# Altium PCB Shared_IoT_Dev.PcbDoc
Units mm, origin at the board's own origin, x right, y up, seen from the top; angles counter-clockwise.
Board outline 66.67 x 60.32 mm, 2 copper layers (Top Layer, Bottom Layer); 59 components, 68 nets, 257 pads, 159 vias.
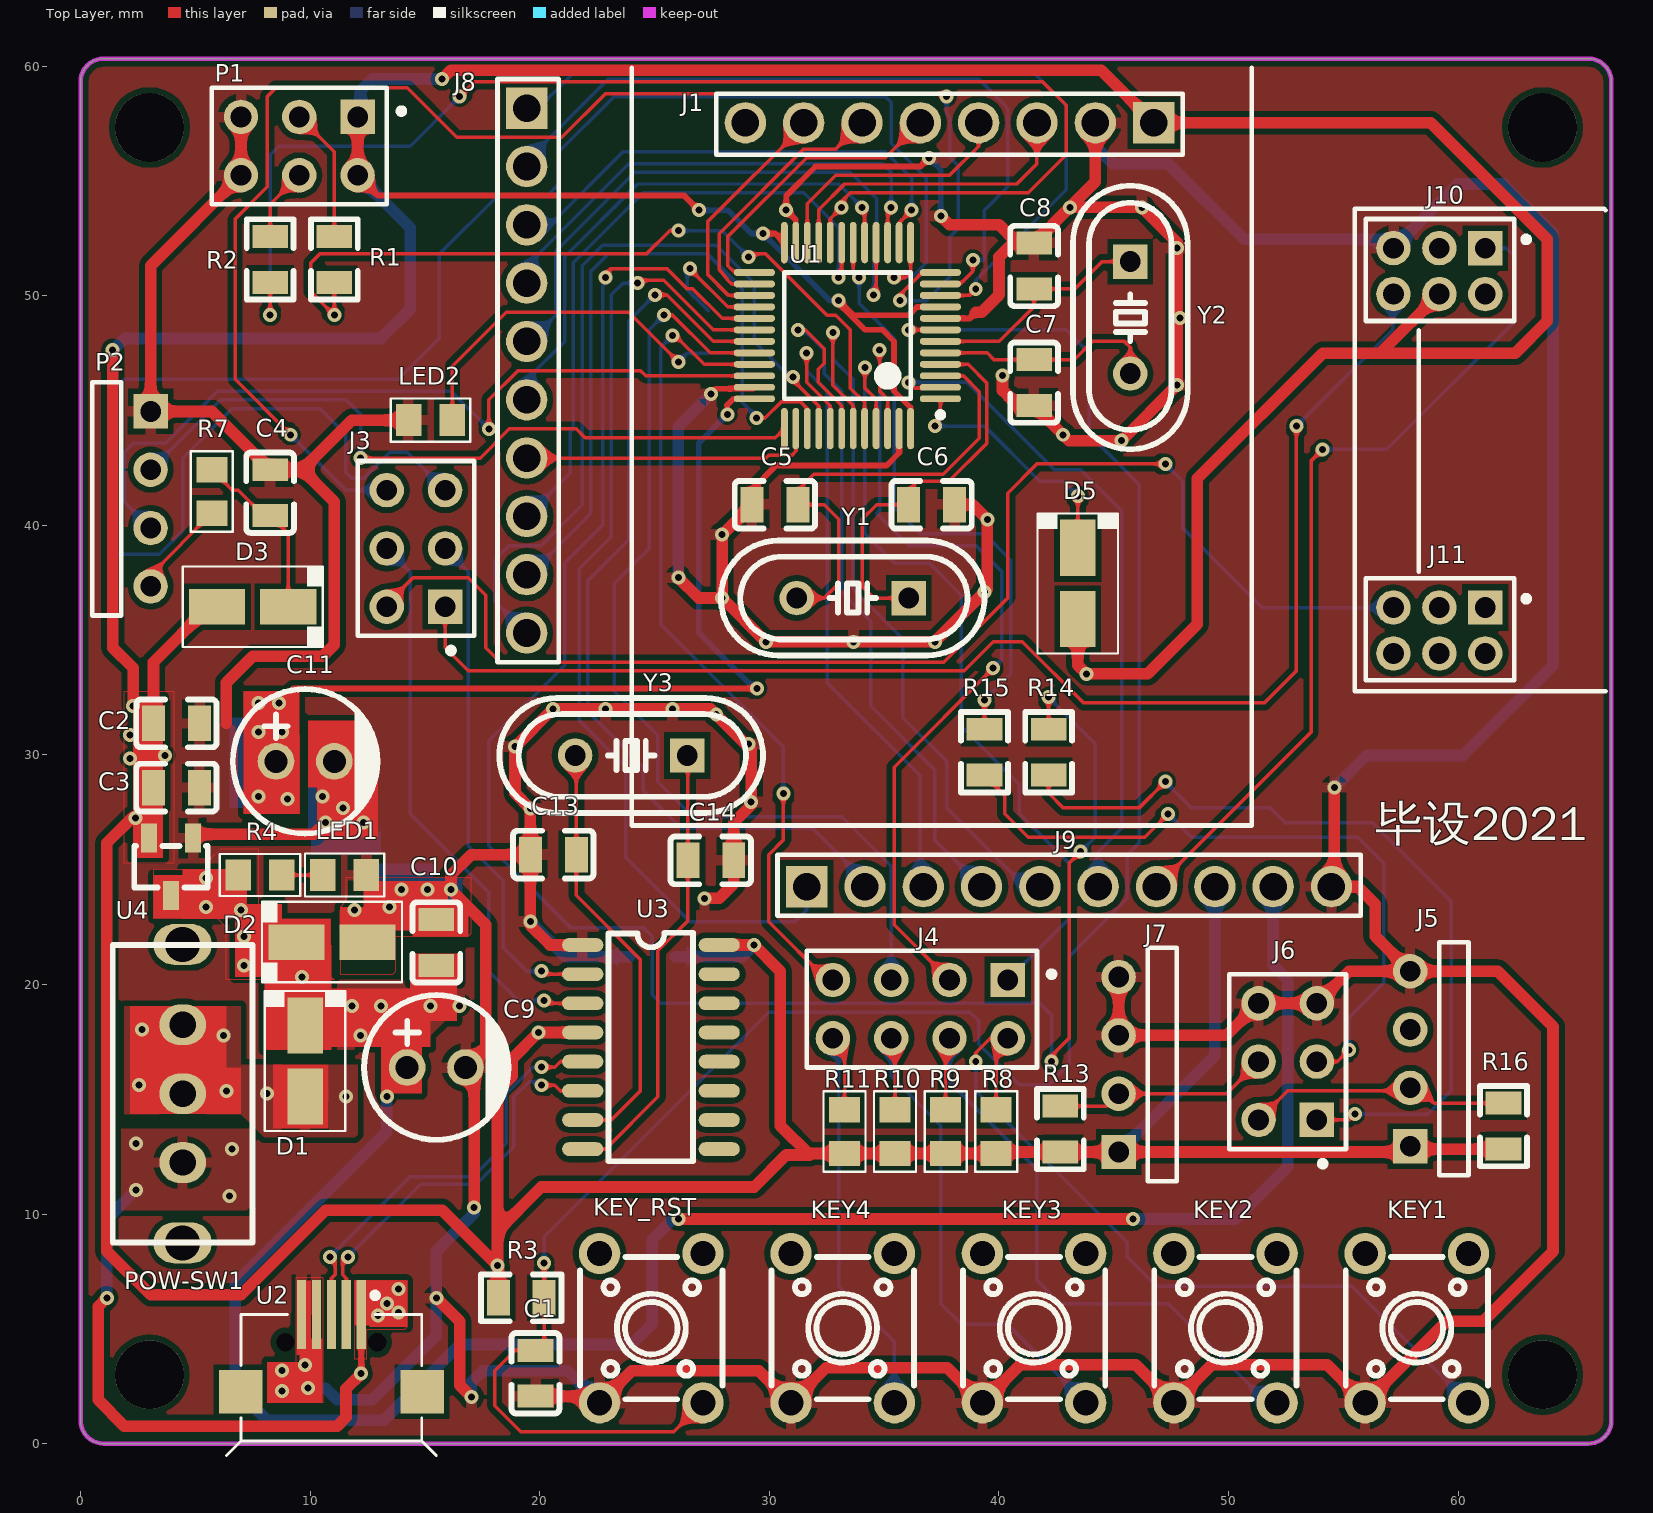
[diagram p0: Top Layer view]
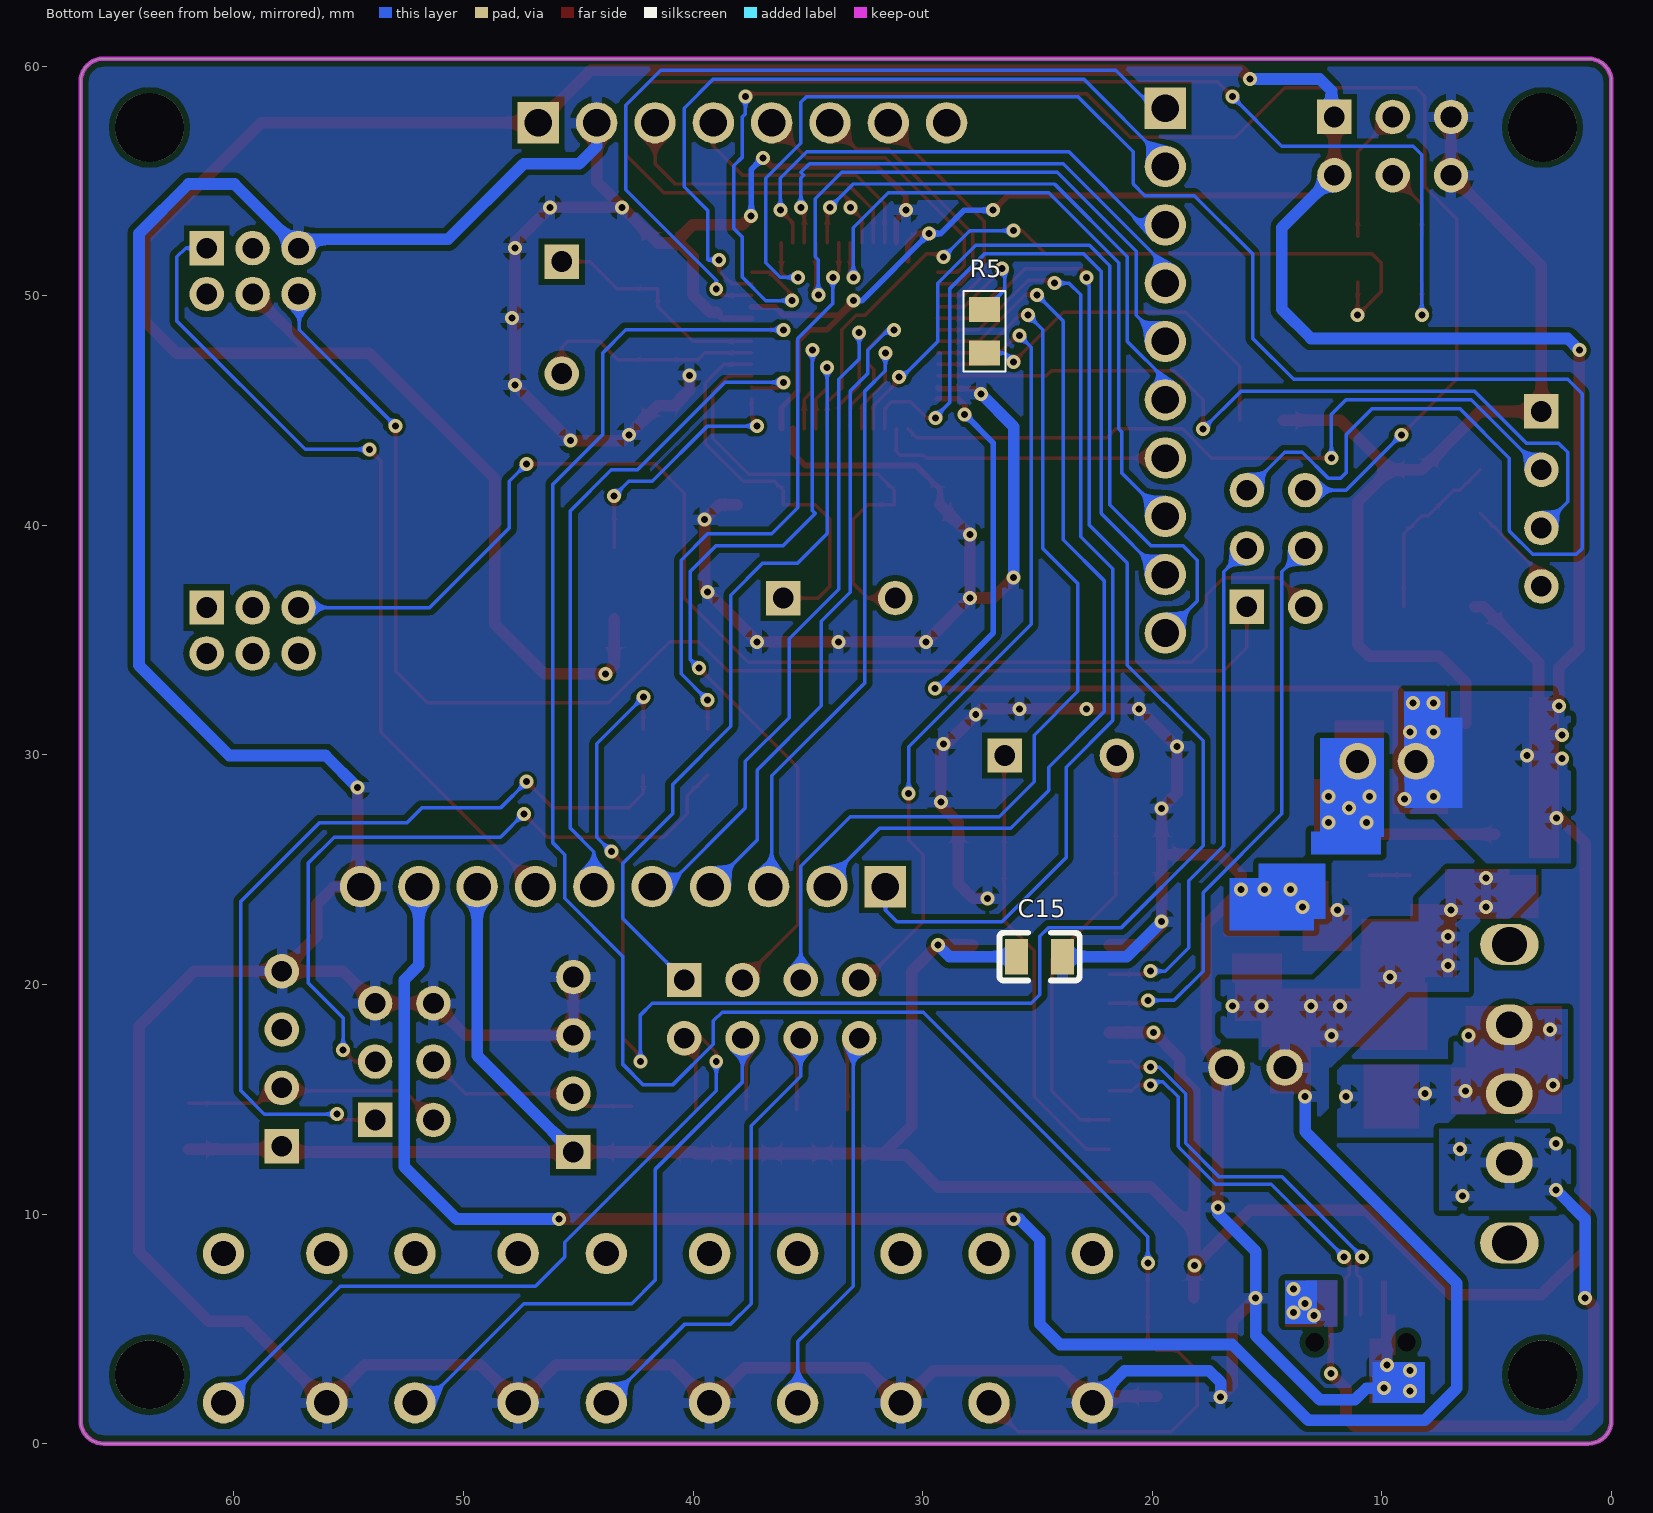
[diagram p1: Bottom Layer view, seen from below]

## Layer stack, top to bottom
Top Solder: solder mask 0.0102, Solder Resist, Dk 3.5
Top Layer: signal copper 0.0356
Dielectric 1: dielectric 0.32, FR-4, Dk 4.8
Bottom Layer: signal copper 0.0356
Bottom Solder: solder mask 0.0102, Solder Resist, Dk 3.5

## Board outline
1,0 cw(c1,1) 0,1.016 0,1 0,59.325 cw(c1,59.325) 1.016,60.325 1,60.325 65.675,60.325 cw(c65.675,59.325) 66.675,59.309 66.675,59.325 66.675,1 cw(c65.675,1) 65.659,0 65.675,0

## Design rules (kind name [scope] priority, off if disabled: settings)
Clearance via_poly [IsVia vs InPolygon] p1: gap=0.152
Clearance poly [InPolygon] p2: gap=0.254
Clearance all [All] p3: gap=0.152
DiffPairsRouting [InDifferentialPairClass('90OM')] p1: maxlimit=0.178 minlimit=0.178 mostfreqgap=0.178 toplayer_minwidth=0.152 toplayer_maxwidth=0.152 toplayer_prefwidth=0.152 bottomlayer_minwidth=0.152 bottomlayer_maxwidth=0.152 bottomlayer_prefwidth=0.152 maxuncoupledlength=12.7
HoleToHoleClearance [All] p1: gap=0 allowstackedmicrovias=TRUE
MinimumSolderMaskSliver [All] p1: minsoldermaskwidth=0
PolygonConnect [All] p1: connectstyle=Relief reliefconductorwidth=0.457 reliefentries=4 polygonreliefangle="90 Angle" airgapwidth=0.254
RoutingVias [All] p1: holewidth=0.305 width=0.61 viastyle="Through Hole" minholewidth=0.305 minwidth=0.61 maxholewidth=0.305 maxwidth=0.61
SilkToSilkClearance [All] p1: silktosilkclearance=0.051
SilkToSolderMaskClearance [IsPad] p1: minsilkscreentomaskgap=0.051 clearancetoexposedcopper=TRUE
SolderMaskExpansion [All] p1: expansion=0.064
Width gnd [InNetClass('GND')] p1: maxlimit=0.762 minlimit=0.254 preferedwidth=0.508
Width pwr [InNetClass('PWR')] p2: maxlimit=0.762 minlimit=0.254 preferedwidth=0.508
Width wall [All] p3: maxlimit=0.152 minlimit=0.152 preferedwidth=0.152
25 further rules are at their usual default settings.

## Classes and differential pairs
net class GND: GND
net class PWR: VBUS VCC3V3 VCC5V
differential pair class 90OM: USB1
differential pair USB1: +D+ -D-

## Components (designator, comment, footprint, x,y, rotation, side; value= is the part's Value field where it differs from the comment)
C1 "CAP" C0805 19.812,4.064 r270 top
C2 "CAP" C0805 3.175,31.369 r0 top
C3 "CAP" C0805 3.175,28.575 r0 top
C4 "CAP" C0805 8.255,40.418 r90 top
C5 "CAP" C0805 29.242,40.894 r0 top
C6 "CAP" C0805 38.068,40.894 r180 top
C7 "CAP" C0805 41.529,47.212 r270 top
C8 "CAP" C0805 41.529,50.292 r90 top
C9 "CAP_POL" CAP-TH_POL 14.224,16.383 r0 top
C10 "CAP" C0805 15.494,22.828 r270 top
C11 "CAP_POL" CAP-TH_POL 8.509,29.718 r0 top
C13 "22pF" C0805 21.59,25.654 r180 top
C14 "22pF" C0805 26.448,25.4 r0 top
C15 "0.1uF" C0805 25.908,21.209 r180 bottom
D1 "1N4007" SMA 9.779,16.663 r270 top
D2 "1N4007" SMA 10.948,21.844 r0 top
D3 "1N4007" SMA 7.493,36.449 r180 top
D5 "Diode 1N4148" SMA 43.434,37.465 r270 top
J1 "Header_8" HDR-TH_8P-P2.54-V 46.736,57.531 r180 top
J3 "Header 3X2" HDR2X3 15.875,36.449 r90 top
J4 "Header4x2" HDR2X4 40.386,20.193 r180 top
J5 "DHT11" HDR1X4H 57.912,12.954 r90 top
J6 "Header 3X2" HDR2X3 53.848,14.097 r90 top
J7 "DS18B20" HDR1X4H 45.212,12.7 r90 top
J8 "Header_10" HDR-TH_10P-P2.54-V 19.431,58.166 r270 top
J9 "Header_10" HDR-TH_10P-P2.54-V 31.623,24.257 r0 top
J10 "Header3X2_Small" HDR3X2_Small 61.182,52.07 r180 top
J11 "Header3X2_Small" HDR3X2_Small 61.182,36.417 r180 top
KEY1 "KEY" KEY-TH_4P 55.951,1.778 r90 top
KEY2 "KEY" KEY-TH_4P 47.615,1.778 r90 top
KEY3 "KEY" KEY-TH_4P 39.279,1.778 r90 top
KEY4 "KEY" KEY-TH_4P 30.942,1.778 r90 top
KEY_RST "KEY" KEY-TH_4P 22.606,1.778 r90 top
LED1 "LED2_1" 0805C 11.496,24.765 r0 top
LED2 "LED2_1" 0805C 15.24,44.577 r180 top
P1 "Header 3X2" HDR2X3 12.065,57.785 r180 top
P2 "SWD" HDR1X4H 3.048,44.958 r270 top
POW-SW1 "Switch" SW 4.445,15.24 r90 top
R1 "100K,0603" R0805 11.049,50.578 r90 top
R2 "100K,0603" R0805 8.255,52.578 r270 top
R3 "10K,0603" R0805 20.193,6.35 r180 top
R4 "Res2" 0805R 7.813,24.765 r0 top
R5 "Res2" 0805R 27.305,48.448 r270 bottom
R7 "Res2" 0805R 5.715,41.468 r90 top
R8 "Res2" 0805R 39.878,13.589 r270 top
R9 "Res2" 0805R 37.677,13.589 r270 top
R10 "Res2" 0805R 35.475,13.589 r270 top
R11 "Res2" 0805R 33.274,13.589 r270 top
R13 "4.7K" R0805 42.672,14.7 r270 top
R14 "100" R0805 42.164,29.115 r90 top
R15 "100" R0805 39.37,29.115 r90 top
R16 "4.7K" R0805 61.976,14.827 r270 top
U1 "STM32F103C8T6" 48P 33.401,48.26 r180 top
U2 "USB-mrico" MICRO_USB 10.922,3.937 r0 top
U3 "CH340G" CH340G_SOIC 21.869,21.717 r180 top
U4 "XC6206P332MR" XC_SOT-23-3 4.887,26.375 r90 top
Y1 "32.768K" CRYSTAL 36.068,36.83 r180 top
Y2 "8M" CRYSTAL 45.72,51.486 r270 top
Y3 "CRYSTAL_12M" CRYSTAL 26.416,29.972 r180 top

## Footprints (in the part's own frame and the unit in brackets; to place one, negate y for a bottom-side part, rotate by r counter-clockwise, add the part's x,y. Pads: shape width x height; smd on the part's side, far side on the other; paste and mask are expansions set on the pad)
48P [mm]
  oval 1.8x0.3 smd: 1(-4.05,2.75) 2(-4.05,2.25) 3(-4.05,1.75) 4(-4.05,1.25) 5(-4.05,0.75) 6(-4.05,0.25) 7(-4.05,-0.25) 8(-4.05,-0.75) 9(-4.05,-1.25) 10(-4.05,-1.75) 11(-4.05,-2.25) 12(-4.05,-2.75) 25(4.05,-2.75) 26(4.05,-2.25) 27(4.05,-1.75) 28(4.05,-1.25) 29(4.05,-0.75) 30(4.05,-0.25) 31(4.05,0.25) 32(4.05,0.75) 33(4.05,1.25) 34(4.05,1.75) 35(4.05,2.25) 36(4.05,2.75)
  oval 0.3x1.8 smd: 13(-2.75,-4.05) 14(-2.25,-4.05) 15(-1.75,-4.05) 16(-1.25,-4.05) 17(-0.75,-4.05) 18(-0.25,-4.05) 19(0.25,-4.05) 20(0.75,-4.05) 21(1.25,-4.05) 22(1.75,-4.05) 23(2.25,-4.05) 24(2.75,-4.05) 37(2.75,4.05) 38(2.25,4.05) 39(1.75,4.05) 40(1.25,4.05) 41(0.75,4.05) 42(0.25,4.05) 43(-0.25,4.05) 44(-0.75,4.05) 45(-1.25,4.05) 46(-1.75,4.05) 47(-2.25,4.05) 48(-2.75,4.05)
  silkscreen extent -4.18,-2.75 2.75,3.57, body extent -3.5,-3.5 3.5,3.5, height 1.6
0805C [mm] "Chip Capacitor, 2-Leads, Body 2.0x1.3mm, IPC Medium Density"
  rect 1.1x1.4 smd: 1(-0.95,0) 2(0.95,0)
  silkscreen extent -1.73,-0.94 1.73,0.94, body extent -1.05,-0.67 1.05,0.67, height 1.2
0805R [mm] "Chip Resistor, 2-Leads, Body 2.0x1.3mm, IPC Medium Density"
  rect 1.1x1.35 smd: 1(-0.95,0) 2(0.95,0)
  silkscreen extent -1.75,-0.91 1.75,0.91, body extent -1.05,-0.67 1.05,0.67, height 1.2
C0805 [mm]
  rect 1x1.55 smd: 1(0,0) 2(2,0)
  silkscreen extent -0.75,-1.04 2.75,1.04
CAP-TH_POL [mm]
  round 1.6 hole 1: 1(0,0) 2(2.54,0)
  silkscreen extent -1.88,-3.15 4.44,3.15
CH340G_SOIC [mm]
  oval 1.798x0.6 smd: 1(0,0) 2(0,1.27) 3(0,2.54) 4(0,3.81) 5(0,5.08) 6(0,6.35) 7(0,7.62) 8(0,8.89) 9(-5.944,8.89) 10(-5.944,7.62) 11(-5.944,6.35) 12(-5.944,5.08) 13(-5.944,3.81) 14(-5.944,2.54) 15(-5.944,1.27) 16(-5.944,0)
  silkscreen extent -4.8,-0.53 -1.12,9.42
CRYSTAL [mm]
  rect 1.5x1.5 hole 0.9: 1(0,0)
  round 1.5 hole 0.9: 2(4.877,0)
  silkscreen extent -3.3,-2.5 8.18,2.5
HDR1X4H [mm] "Connector; Header; 4 Position; Right Angle"
  rect 1.5x1.5 hole 0.9: 1(0,0)
  round 1.5 hole 0.9: 2(2.54,0) 3(5.08,0) 4(7.62,0)
  silkscreen extent -1.27,-2.54 8.89,-1.27
HDR2X3 [mm] "Connector; Header; 3x2 Position"
  rect 1.5x1.5 hole 0.9: 1(0,0)
  round 1.5 hole 0.9: 2(0,2.54) 3(2.54,0) 4(2.54,2.54) 5(5.08,0) 6(5.08,2.54)
  silkscreen extent -2.03,-1.27 6.35,3.81
HDR2X4 [mm]
  rect 1.5x1.5 hole 0.9: 1(0,0)
  round 1.5 hole 0.9: 2(0,2.54) 3(2.54,0) 4(2.54,2.54) 5(5.08,0) 6(5.08,2.54) 7(7.62,0) 8(7.62,2.54)
  silkscreen extent -2.03,-1.27 8.76,3.81
HDR3X2_Small [mm]
  rect 1.5x1.5 hole 0.9: 1(0,0)
  round 1.5 hole 0.9: 2(0,2) 3(2,0) 4(2,2) 5(4,0) 6(4,2)
  silkscreen extent -1.91,-1.27 5.21,3.18
HDR-TH_8P-P2.54-V [mm]
  rect 1.8x1.8 hole 1.2: 1(0,0)
  round 1.8 hole 1.2: 2(2.54,0) 3(5.08,0) 4(7.62,0) 5(10.16,0) 6(12.7,0) 7(15.24,0) 8(17.78,0)
  silkscreen extent -1.27,-1.27 19.05,1.4
HDR-TH_10P-P2.54-V [mm]
  rect 1.8x1.8 hole 1.2: 1(0,0)
  round 1.8 hole 1.2: 2(2.54,0) 3(5.08,0) 4(7.62,0) 5(10.16,0) 6(12.7,0) 7(15.24,0) 8(17.78,0) 9(20.32,0) 10(22.86,0)
  silkscreen extent -1.27,-1.27 24.13,1.4
KEY-TH_4P [mm]
  round 1.8 hole 1.1: 1(0,0) 2(6.502,0) 3(0,-4.501) 4(6.502,-4.501)
  silkscreen extent 0.15,-5.35 6.35,0.85
MICRO_USB [mm]
  rect 0.4x3 smd: 1(1.3,1.679) 2(0.65,1.679) 3(0,1.679) 4(-0.65,1.679) 5(-1.3,1.679)
  round 0 hole 0.8 unplated: MH1(2,0.471) MH2(-2,0.471)
  rect 1.9x1.9 smd: ""(-3.95,-1.679) ""(3.95,-1.679)
  silkscreen extent -4.57,-4.46 4.57,2.64
R0805 [mm]
  rect 1x1.55 smd: 1(0,0) 2(2,0)
  silkscreen extent -0.75,-1.02 2.75,1.02
SMA [mm] "Molded Diode, 2-Leads, Body 4.3x2.7mm, IPC Medium Density"
  rect 2.45x1.55 smd: 1(1.55,0) 2(-1.55,0)
  silkscreen extent -3.05,-1.75 3.05,1.75, body extent -2.3,-1.45 2.3,1.45, height 2.44
SW [mil]
  oval 70x80 hole 45: 1(-118.11,0) 2(0,0) 3(118.11,0)
  oval 70x100 hole 60: 4(-255.91,0) 5(255.91,0)
  silkscreen extent -255,-120 255,120
XC_SOT-23-3 [mm]
  rect 1.25x0.7 smd: 1(0,0) 2(0,1.9) 3(-2.499,0.95)
  silkscreen extent -2.15,-0.65 -0.35,2.55

## Part data
C13 C14 C15: library part CAP, "CAP"
D1 D2 D3: library part DIODE
D5: "High Conductance Fast Diode"
J3 J6 P1: "Header, 3-Pin, Dual row"
J5 J7 P2: library part "Header 4", "Header, 4-Pin"
LED1 LED2: "Typical RED, GREEN, YELLOW, AMBER GaAs LED"
POW-SW1: library part Swich_On_Off
R1 R2 R3: library part Res2, "Resistor"
R4 R5 R8 R9 R10 R11: library part Res_3, "Resistor"
R7: "Resistor"
R13 R14 R15 R16: library part RES, "RES"
U2: library part usb-STM
U4: "XC6206P332MR Power Lower to 3.3v"
Y1 Y2 Y3: library part CRYSTAL, "CRYSTAL"

## Free pads (board coordinates)
  round 3 hole 3 unplated paste+0.305: 0(3,3) 0(3,57.325) 0(63.675,3) 0(63.675,57.325)

## Via types
v1: diameter 0.61, hole 0.305, Top Layer to Bottom Layer, 159 vias

## Nets (pads, with @x,y where several pads share a name; then routed paths per layer and width w, separated by ;. In a path a pad name is that pad's centre, name@x,y a point inside that pad or via, vN(x,y) a via of type N, cw(c..) or ccw(c..) an arc to the next point about the centre after c; other vN are vias at no path point)
BOOT0: R1.1 U1.44 | length 34.7
  Top Layer w0.152: R1.1 v1(11.049,49.149) 10.033,50.165 10.033,51.435 10.414,51.816 24.638,51.816 25.654,52.832 v1(26.035,52.832) ; v1(29.083,51.689) 29.21,51.689 29.337,51.816 29.845,51.816 32.512,49.149 32.893,49.149 33.528,48.514 33.528,45.974 34.151,45.351 U1.44
  Bottom Layer w0.152: v1(26.035,52.832) 27.94,52.832 v1(29.083,51.689)
BOOT1: R2.2 U1.20 | length 59.6
  Top Layer w0.152: v1(8.255,49.149) R2.2 ; v1(16.51,58.674) 17.145,59.309 41.91,59.309 42.926,58.293 42.926,56.134 41.275,54.483 33.528,54.483 33.147,54.102 v1(33.147,53.848) 32.651,53.352 U1.20
  Bottom Layer w0.152: v1(8.255,49.149) 8.255,56.134 8.636,56.515 14.351,56.515 v1(16.51,58.674)
D+: U2.3 U3.5 | length 18.5
  Top Layer w0.152: v1(10.853,8.128) 10.955,8.128 11.082,8.001 11.082,7.352 10.922,7.192 U2.3 ; v1(20.066,16.396) 20.653,16.396 20.894,16.637 U3.5
  Bottom Layer w0.152: v1(10.853,8.128) 14.359,11.633 17.094,11.633 18.542,13.081 18.542,15.24 19.698,16.396 v1(20.066,16.396)
D-: U2.2 U3.6 | length 17.6
  Top Layer w0.152: U2.2 11.572,7.192 11.412,7.352 11.412,8.001 11.539,8.128 v1(11.641,8.128) ; v1(20.066,15.608) 20.653,15.608 20.894,15.367 U3.6
  Bottom Layer w0.152: v1(11.641,8.128) 14.816,11.303 17.231,11.303 18.775,12.848 18.872,12.944 18.872,15.103 19.537,15.769 19.906,15.769 v1(20.066,15.608)
DHT11_DQ: J5.2 J6.2 R16.1 | length 11.5
  Top Layer w0.152: J6.2 52.578,15.367 57.785,15.367 J5.2 58.293,15.494 58.96,14.827 R16.1
DS_DQ: J6.4 J7.2 R13.1 | length 9.4
  Top Layer w0.152: R13.1 44.672,14.7 J7.2 49.911,15.24 J6.4
ESP_RST: J9.7 J10.1 | length 37
  Top Layer w0.152: J9.7 53.594,30.988 53.594,42.799 v1(54.102,43.307)
  Bottom Layer w0.152: v1(54.102,43.307) 56.896,43.307 62.484,48.895 62.484,51.689 62.103,52.07 J10.1@61.214,52.07
ESP_RX: J3.1 J10.6 | length 59.7
  Top Layer w0.152: J3.1 15.875,34.671 16.891,33.655 38.481,33.655 39.751,34.925 41.021,34.925 43.688,32.258 51.562,32.258 52.959,33.655 v1(52.959,44.323)
  Bottom Layer w0.152: v1(52.959,44.323) 57.15,48.514 J10.6@57.15,50.165
ESP_TX: J3.2 J11.5 | length 57.3
  Top Layer w0.152: J3.2 13.335,36.576 14.478,37.719 16.891,37.719 17.653,36.957 17.653,34.671 18.288,34.036 37.592,34.036 40.386,36.83 40.386,41.402 41.656,42.672 v1(47.244,42.672)
  Bottom Layer w0.152: v1(47.244,42.672) 48.006,41.91 48.006,39.878 51.467,36.417 J11.5
GND: C1.2 C2.2 C3.2 C4.2 C5.1 C6.1 C7.2 C8.2 C9.2 C10.1 C11.2 C13.2 C14.2 C15.2 D2.1 J1.2 J5.4 J6.5 J6.6 J7.3 J7.4 J9.10 J10.5 KEY1.1 KEY2.1 KEY3.1 KEY4.1 KEY_RST.1 LED1.2 LED2.2 P1.5 P1.6 P2.1 U1.8 U1.23 U1.35 U1.47 U2.4 U2.5 U3.1 U4.1 | length 374.6
  Top Layer w0.254: v1@27.368,45.657 27.661,45.949 29.286,45.949 U1.35@29.337,45.999 ; C5.1 29.242,41.561 30.277,42.596 35.103,42.596 35.651,43.144 U1.47 ; U1.23 31.151,53.304 v1(30.734,53.721) 30.734,54.356 32.004,55.626 36.576,55.626 v1(36.957,56.007) ; U1.8 38.723,49.01 38.989,49.276
  Top Layer w0.508: U4.1@5.08,26.543 10.16,26.543 v1(10.668,27.051) ; 6.35,31.369 6.35,33.147 7.493,34.29 10.541,34.29 11.049,34.798 11.049,41.021 9.652,42.418 ; P1.5 P1.6 3.048,51.308 P2.1 5.715,44.958 C4.2 9.652,42.418 ; LED2.2 11.811,44.577 9.652,42.418 ; v1(15.494,6.35) 16.51,5.334 16.51,2.54 v1(17.018,2.032) ; v1(17.145,10.287) 17.145,16.002 C9.2 17.653,17.272 17.653,22.606 v1(16.129,24.13) 16.129,24.765 17.018,25.654 C13.2 ; C1.2 22.32,2.064 KEY_RST.1 24.003,3.175 29.545,3.175 KEY4.1 32.466,3.302 37.755,3.302 KEY3.1 40.93,3.429 45.964,3.429 KEY2.1 49.266,3.429 54.3,3.429 KEY1.1 59.507,5.334 61.087,5.334 64.135,8.382 64.135,18.161 61.722,20.574 J5.4@58.039,20.574 ; U3.1 20.447,21.717 19.59,22.574 v1(19.59,22.733) C13.2 ; v1(26.035,37.719) 26.924,36.83 v1(27.94,36.83) ; v1(27.178,23.749) 27.813,23.749 28.448,24.384 C14.2 28.448,27.051 29.21,27.813 29.21,30.226 27.432,32.004 v1(20.574,32.004) v1(18.923,30.353) 18.923,28.321 v1(19.59,27.654) C13.2 ; C5.1 v1(27.94,39.592) v1(27.94,36.83) ; v1(37.465,53.467) 37.846,53.086 40.005,53.086 C8.2@40.799,52.292 ; C6.1 38.862,40.894 v1(39.497,40.259) 39.497,37.211 v1(37.211,34.925) v1(29.845,34.925) v1(27.94,36.83) ; 38.989,49.276 39.243,49.276 40.005,50.038 40.005,51.689 40.608,52.292 C8.2@40.799,52.292 ; 40.157,46.076 v1(40.157,46.533) 40.157,45.872 40.818,45.212 C7.2 43.053,43.688 v1(45.339,43.688) v1(47.752,46.101) 47.752,52.324 v1(46.228,53.848) v1(43.085,53.848) ; J1.2 44.196,54.959 v1(43.085,53.848) ; J7.4 J7.3 49.911,17.78 J6.6 J6.5 55.245,20.574 J5.4 56.388,22.098 56.388,23.495 55.626,24.257 J9.10 54.61,24.384 v1(54.61,28.575) ; C8.2@40.799,52.292 C8.2 v1(43.085,53.848)
  Bottom Layer w0.254: v1(36.957,56.007) 37.465,55.499 v1(37.465,53.467)
  Bottom Layer w0.508: v1(9.906,2.413) 10.668,2.413 11.176,1.905 12.7,1.905 15.494,4.699 v1(15.494,6.35) 15.494,8.382 17.145,10.033 v1(17.145,10.287) ; v1(17.018,2.032) 17.018,2.667 17.526,3.175 21.209,3.175 KEY_RST.1 ; v1(19.59,22.733) 21.114,21.209 C15.2 ; v1(26.035,37.719) 26.035,44.298 v1(27.457,45.72) ; J1.2 44.196,56.515 44.958,55.753 47.371,55.753 50.673,52.451 56.896,52.451 J10.5@57.229,52.118 ; v1(54.61,28.575) 56.007,29.972 60.198,29.972 64.135,33.909 64.135,52.705 61.976,54.864 59.976,54.864 J10.5@57.229,52.118 ; J10.5 J10.5@57.229,52.118
  other v1: 8.763,2.286 8.763,3.175 9.779,3.429 11.938,23.241 13.462,23.368 13.97,24.13 15.113,24.13 12.319,27.051 11.43,27.686 29.21,27.94 10.541,28.194 12.319,28.194 29.083,30.48 27.686,31.75 22.86,32.004 25.781,32.004 33.655,34.925 39.37,37.084 42.799,43.942 47.879,49.022 47.752,52.07
KEY1: J4.2 KEY1.3 R8.1 | length 34.3
  Top Layer w0.152: v1@38.862,16.764 v1(38.989,16.637) 38.989,17.018 39.624,17.653 J4.2 39.878,17.145 R8.1
  Bottom Layer w0.152: v1(38.989,16.637) 38.989,15.367 45.593,8.763 45.593,8.128 46.863,6.858 55.372,6.858 KEY1.3
KEY2: J4.4 KEY2.3 R9.1 | length 28.8
  Top Layer w0.152: J4.4@37.465,17.653 J4.4 37.677,17.484 R9.1 ; KEY2.3 KEY2.3@52.578,1.778
  Bottom Layer w0.152: J4.4 37.846,15.748 41.656,11.938 41.656,7.112 42.672,6.096 47.371,6.096 51.689,1.778 KEY2.3
KEY3: J4.6 KEY3.3 R10.1 | length 24.5
  Top Layer w0.152: J4.6@35.052,17.653 J4.6 35.475,17.484 R10.1 ; KEY3.3 KEY3.3@44.323,1.778
  Bottom Layer w0.152: J4.6 35.306,16.002 37.465,13.843 37.465,6.096 38.354,5.207 40.35,5.207 KEY3.3
KEY4: J4.8 KEY4.3 R11.1 | length 21.1
  Top Layer w0.152: J4.8 33.274,17.145 R11.1 ; KEY4.3 KEY4.3@36.195,1.778
  Bottom Layer w0.152: J4.8 33.02,17.399 33.02,6.858 35.433,4.445 KEY4.3@35.433,1.778
LED2: R5.1 U1.28 | length 6
  Top Layer w0.152: v1(26.543,51.181) 26.543,51.156 28.189,49.51 U1.28
  Bottom Layer w0.152: v1(26.543,51.181) 26.518,51.181 26.416,51.283 26.416,50.267 R5.1@27.33,49.352
NetC4_1: C4.1 D3.2 R7.2 | length 7.7
  Top Layer w0.152: R7.2 6.604,41.529 6.858,41.529 7.969,40.418 C4.1 9.043,39.63 D3.2
NetC13_1: C13.1 U3.7 Y3.2 | length 18.8
  Top Layer w0.152: Y3.2 21.59,29.921 C13.1 21.59,23.876 24.384,21.082 24.384,15.367 23.114,14.097 U3.7
NetC14_1: C14.1 U3.8 Y3.1 | length 19.6
  Top Layer w0.152: U3.8 22.86,12.827 25.146,15.113 25.146,21.463 26.448,22.765 C14.1 26.448,29.94 Y3.1
NetD1_1: D1.1 POW-SW1.2 POW-SW1.3
  other v1: 11.557,15.113 8.128,15.24 6.35,15.367 2.54,15.621 6.223,17.78 2.667,18.034
NetD5_2: D5.2 U1.1 | length 11
  Top Layer w0.152: v1(37.211,44.323) 37.211,44.478 37.451,44.718 U1.1 ; D5.2 v1(43.434,41.275)
  Bottom Layer w0.152: v1(37.211,44.323) 39.37,44.323 41.783,41.91 42.799,41.91 v1(43.434,41.275)
NetJ6_1: J6.1 R14.1 | length 35.8
  Top Layer w0.152: R14.1 42.164,28.321 42.799,27.686 46.101,27.686 v1(47.244,28.829) ; J6.1 55.245,14.097 v1(55.499,14.351)
  Bottom Layer w0.152: v1(47.244,28.829) 48.387,27.686 51.816,27.686 52.451,27.051 56.261,27.051 59.69,23.622 59.69,15.367 58.674,14.351 v1(55.499,14.351)
NetJ6_3: J6.3 R15.1 | length 30.7
  Top Layer w0.152: R15.1 40.259,28.226 40.259,27.432 41.275,26.416 46.355,26.416 v1(47.371,27.432) ; J6.3 54.737,16.637 v1(55.245,17.145)
  Bottom Layer w0.152: v1(47.371,27.432) 48.387,26.416 55.626,26.416 56.769,25.273 56.769,20.066 55.245,18.542 v1(55.245,17.145)
NetLED1_1: LED1.1 R4.2 | length 1.8
  Top Layer w0.152: R4.2 LED1.1
NetLED2_1: LED2.1 R5.2 | length 15.5
  Top Layer w0.152: LED2.1 16.19,46.924 18.542,49.276 23.876,49.276 v1(26.035,47.117)
  Bottom Layer w0.152: v1(26.035,47.117) 26.416,47.498 R5.2
NetP1_3: P1.3 R1.2 | length 5.8
  Top Layer w0.152: P1.3 11.049,56.261 R1.2
NetP1_4: P1.4 R2.1 | length 3.2
  Top Layer w0.152: R2.1 8.255,53.975 P1.4
NetP2_4: P2.4 R7.1 | length 4.3
  Top Layer w0.152: P2.4 3.048,37.851 R7.1
OLED_CS: J1.3 U1.21 | length 13.5
  Top Layer w0.152: U1.21 32.151,53.741 33.274,54.864 40.767,54.864 41.656,55.753 J1.3
OLED_D0: J1.6 U1.26 | length 11.6
  Top Layer w0.152: U1.26 28.357,50.51 28.194,50.673 27.813,51.149 27.813,52.705 31.496,56.388 32.893,56.388 J1.6
OLED_D1: J1.7 U1.27 | length 10.8
  Top Layer w0.152: U1.27 28.222,50.01 27.305,50.927 27.305,53.213 31.496,57.404 J1.7
OLED_DC: J1.5 U1.25 | length 13
  Top Layer w0.152: U1.25 28.492,51.01 28.194,51.308 28.194,52.578 31.623,56.007 35.052,56.007 J1.5
OLED_RES: J1.4 U1.22 | length 11.2
  Top Layer w0.152: U1.22 31.651,54.003 32.893,55.245 37.846,55.245 39.116,56.515 J1.4
OSCIN: C7.1 U1.5 Y2.2 | length 10
  Top Layer w0.152: U1.5 39.485,47.51 39.783,47.212 C7.1 43.275,47.212 44.069,48.006 45.466,48.006 45.72,47.752 Y2.2
OSCOUT: C8.1 U1.6 Y2.1 | length 10.2
  Top Layer w0.152: U1.6 40.009,48.01 41.529,49.53 C8.1 43.307,50.292 44.501,51.486 Y2.1
PA0: J8.1 U1.10 | length 36.1
  Top Layer w0.152: U1.10 38.707,50.01 v1(38.989,50.292)
  Bottom Layer w0.152: J8.1@19.558,57.785 21.59,59.817 41.402,59.817 42.926,58.293 42.926,54.61 38.989,50.673 v1(38.989,50.292)
PA1: J8.2 U1.11 | length 32.9
  Top Layer w0.152: U1.11 38.318,50.51 38.862,51.054 v1(38.862,51.562)
  Bottom Layer w0.152: J8.2 19.431,55.88 22.987,59.436 39.116,59.436 40.386,58.166 40.386,54.737 39.37,53.721 39.37,51.562 v1(38.862,51.562)
PA4: J8.3 U1.14 | length 21.9
  Top Layer w0.152: U1.14 35.651,53.177 36.068,53.594 36.068,53.848 v1(36.195,53.721)
  Bottom Layer w0.152: J8.3@19.431,52.959 20.32,52.959 23.622,56.261 35.052,56.261 36.195,55.118 v1(36.195,53.721)
PA5: J8.4 U1.15 | length 22.3
  Top Layer w0.152: U1.15 35.151,53.82 35.179,53.792 35.235,53.848 v1(35.306,53.848) v1@35.433,53.975
  Bottom Layer w0.152: J8.4@19.431,50.419 19.431,51.308 23.876,55.753 34.925,55.753 35.306,55.372 35.179,55.245 35.306,55.118 v1(35.306,53.848)
PA6: J8.5 U1.16 | length 27
  Top Layer w0.152: v1(34.544,50.038) 34.651,50.145 U1.16
  Bottom Layer w0.152: J8.5 19.558,48.006 20.701,49.149 20.701,51.943 24.13,55.372 33.528,55.372 34.671,54.229 34.671,51.689 34.544,51.562 v1(34.544,50.038)
PA7: J8.6 U1.17 | length 23.2
  Top Layer w0.152: v1(34.036,53.848) 34.151,53.733 U1.17
  Bottom Layer w0.152: J8.6 19.431,46.355 21.082,48.006 21.082,51.689 24.257,54.864 33.02,54.864 v1(34.036,53.848)
PA8: R14.2 U1.29 | length 84.5
  Top Layer w0.152: v1(22.86,50.8) 22.86,50.927 23.114,51.181 25.527,51.181 26.416,50.292 26.67,50.292 27.952,49.01 U1.29 U1.29@29.363,49.022 ; R14.2 v1(42.164,32.512) ; v1(42.291,16.637) 42.291,16.891 43.053,17.653 43.053,25.273 v1(43.561,25.781)
  Bottom Layer w0.152: v1(22.86,50.8) 22.86,50.546 22.733,50.419 22.733,40.005 21.082,38.354 21.082,33.909 17.78,30.607 17.78,26.035 21.336,22.479 24.511,22.479 24.892,22.098 24.892,19.558 25.273,19.177 41.783,19.177 42.291,18.669 v1(42.291,16.637) ; v1(42.164,32.512) 44.196,30.48 44.196,26.416 v1(43.561,25.781)
PA9: J9.1 U1.30 | length 43.6
  Top Layer w0.152: v1(24.257,50.546) 24.384,50.673 25.4,50.673 27.563,48.51 U1.30
  Bottom Layer w0.152: v1(24.257,50.546) 23.622,50.546 23.114,50.038 23.114,39.497 21.717,38.1 21.717,31.496 23.749,29.464 23.749,25.527 26.543,22.733 31.115,22.733 31.623,23.241 J9.1
PA10: J9.2 U1.31 | length 40.5
  Top Layer w0.152: v1(25.019,50.038) 25.527,50.038 27.555,48.01 U1.31
  Bottom Layer w0.152: v1(25.019,50.038) 23.876,48.895 23.876,39.37 22.098,37.592 22.098,31.877 24.511,29.464 24.511,28.448 26.162,26.797 31.877,26.797 34.163,24.511 J9.2
PA11: J4.5 U1.32 | length 43.8
  Top Layer w0.152: v1(25.4,49.149) 25.781,49.149 27.42,47.51 U1.32 ; J4.5 J4.5@35.306,20.701
  Bottom Layer w0.152: v1(25.4,49.149) 24.765,48.514 24.765,38.989 23.241,37.465 23.241,32.766 25.146,30.861 25.146,28.829 26.67,27.305 33.147,27.305 35.306,25.146 J4.5
PA12: J4.7 U1.33 | length 36.4
  Top Layer w0.152: v1(25.781,48.26) 25.908,48.26 27.158,47.01 U1.33 ; v1(30.607,28.321) 30.607,26.289 29.972,25.654 29.972,22.733 32.512,20.193 J4.7 J4.7@32.766,20.447
  Bottom Layer w0.152: v1(25.781,48.26) 25.273,47.752 25.273,35.687 30.607,30.353 v1(30.607,28.321)
PA15: J8.7 U1.38 | length 12.8
  Top Layer w0.152: J8.7 29.845,42.926 29.972,43.053 30.988,43.053 31.151,43.216 U1.38
PB0: R15.2 U1.18 | length 26.1
  Top Layer w0.152: U1.18 33.651,51.058 v1(33.909,50.8) ; R15.2 v1(39.37,32.385)
  Bottom Layer w0.152: v1(33.909,50.8) 33.909,49.657 35.433,48.133 35.433,40.767 36.576,39.624 39.37,39.624 40.513,38.481 40.513,33.528 v1(39.37,32.385)
PB1: J8.8 U1.19 | length 29.1
  Top Layer w0.152: v1(33.02,50.8) 33.151,50.931 U1.19
  Bottom Layer w0.152: J8.8 21.336,42.291 21.336,44.069 21.463,44.196 21.463,51.435 24.511,54.483 31.496,54.483 33.02,52.959 v1(33.02,50.8)
PB3: J8.9 U1.39 | length 31.4
  Top Layer w0.152: v1(29.439,44.679) 29.82,44.679 30.531,45.39 31.344,45.39 31.651,45.082 U1.39
  Bottom Layer w0.152: J8.9@19.431,37.719 22.225,40.513 22.225,51.054 22.987,51.816 27.305,51.816 28.829,50.292 28.829,45.339 v1@29.464,44.704
PB4: J8.10 U1.40 | length 35.1
  Top Layer w0.152: v1(31.039,46.457) 31.039,46.304 32.151,45.192 U1.40
  Bottom Layer w0.152: J8.10 18.034,36.703 18.034,38.481 18.669,39.116 20.066,39.116 21.844,40.894 21.844,51.308 22.733,52.197 27.686,52.197 29.337,50.546 29.337,48.006 v1@30.988,46.355
PB5: J9.3 U1.41 | length 29.1
  Top Layer w0.152: v1(31.623,47.498) 31.623,46.228 32.651,45.2 U1.41
  Bottom Layer w0.152: v1(31.623,47.498) 31.623,46.736 32.512,45.847 32.512,33.147 36.576,29.083 36.576,24.384 J9.3
PB6: J9.4 U1.42 | length 33.2
  Top Layer w0.152: v1(31.242,48.514) 31.559,48.514 32.385,47.688 32.385,47.053 32.131,46.799 32.131,46.228 33.151,45.208 U1.42
  Bottom Layer w0.152: v1(31.242,48.514) 31.496,48.514 32.385,47.625 32.385,46.609 33.147,45.847 33.147,37.084 34.417,35.814 34.417,32.131 37.211,29.337 37.211,26.289 J9.4
PB7: J9.5 U1.43 | length 32.8
  Top Layer w0.152: v1(32.766,48.387) 32.766,46.101 33.651,45.216 U1.43
  Bottom Layer w0.152: v1(32.766,48.387) 32.766,47.244 33.655,46.355 33.655,37.211 35.814,35.052 35.814,31.623 37.719,29.718 37.719,27.686 41.148,24.257 J9.5
PB8: J4.1 U1.45 | length 35.2
  Top Layer w0.152: v1(34.163,46.863) 34.163,45.974 34.651,45.486 U1.45
  Bottom Layer w0.152: v1(34.163,46.863) 34.163,39.624 35.433,38.354 36.957,38.354 38.354,36.957 38.354,31.242 40.894,28.702 40.894,27.432 43.053,25.273 43.053,22.86 J4.1
PB9: J4.3 U1.46 | length 38
  Top Layer w0.152: v1(34.798,47.625) 34.798,45.847 35.151,45.494 U1.46 ; J4.3 35.433,22.606 35.433,29.464 v1(39.751,33.782)
  Bottom Layer w0.152: v1(34.798,47.625) 34.798,40.64 34.671,40.513 36.068,39.116 38.989,39.116 40.132,37.973 40.132,34.163 v1(39.751,33.782)
PC13: J9.6 U1.2 | length 29.9
  Top Layer w0.152: v1(36.068,46.228) 36.322,45.974 37.415,45.974 U1.2
  Bottom Layer w0.152: v1(36.068,46.228) 38.608,46.228 42.418,42.418 43.561,42.418 45.339,40.64 45.339,26.797 44.323,25.781 J9.6
PC14: C5.2 U1.3 Y1.2 | length 20.4
  Top Layer w0.152: Y1.2 32.385,36.83 33.02,37.465 33.02,40.259 32.385,40.894 C5.2 31.242,41.529 31.928,42.215 37.567,42.215 39.141,43.79 39.141,45.822 38.453,46.51 U1.3
PC15: C6.2 U1.4 Y1.1 | length 17.3
  Top Layer w0.152: Y1.1 34.544,36.83 34.036,37.338 34.036,40.259 34.671,40.894 C6.2 36.068,41.529 36.449,41.91 37.821,41.91 39.472,43.561 39.472,46.199 38.66,47.01 U1.4
RESET: C1.1 KEY_RST.3 R3.1 U1.7 | length 90.9
  Top Layer w0.152: v1(20.193,7.874) R3.1 20.193,4.445 C1.1 18.923,4.064 18.034,3.175 18.034,1.651 19.177,0.508 25.837,0.508 KEY_RST.3 ; v1@36.068,48.51 U1.7
  Bottom Layer w0.152: v1(20.193,7.874) 20.193,9.017 29.972,18.796 38.735,18.796 39.116,18.415 39.116,17.399 40.894,15.621 42.164,15.621 43.053,16.51 43.053,21.209 45.593,23.749 45.593,25.654 46.101,26.162 46.101,41.783 43.942,43.942 43.942,47.498 42.926,48.514 v1(36.068,48.514)
SWCLK: P2.2 U1.37 | length 31.9
  Top Layer w0.152: v1(12.192,42.926) 17.399,42.926 18.669,44.196 21.59,44.196 21.971,43.815 30.256,43.815 U1.37
  Bottom Layer w0.152: P2.2 6.096,45.466 11.557,45.466 12.192,44.831 v1(12.192,42.926)
SWIO: P2.3 U1.34 | length 34.9
  Top Layer w0.152: v1(17.78,44.196) 17.78,45.466 19.05,46.736 24.384,46.736 24.61,46.51 U1.34
  Bottom Layer w0.152: P2.3 1.905,41.021 1.905,43.18 2.286,43.561 3.683,43.561 5.969,45.847 16.129,45.847 v1(17.78,44.196)
URX: J3.4 U3.3 | length 25.1
  Top Layer w0.152: v1@20.066,19.304 v1(20.193,19.304) 20.32,19.177 U3.3
  Bottom Layer w0.152: J3.4 14.351,37.973 14.351,27.432 17.78,24.003 17.78,20.574 19.05,19.304 v1(20.193,19.304)
USART2_RX: J3.5 U1.13 | length 83.2
  Top Layer w0.152: v1(35.433,50.8) 35.941,50.8 36.151,51.01 U1.13
  Bottom Layer w0.152: J3.5 14.224,43.18 13.462,43.18 12.319,42.037 11.811,42.037 11.557,42.291 11.557,43.942 10.414,45.085 6.604,45.085 4.445,42.926 4.445,39.751 3.429,38.735 1.524,38.735 1.27,38.989 1.27,45.72 1.905,46.355 13.843,46.355 15.621,48.133 15.621,51.816 18.161,54.356 20.32,54.356 20.828,54.864 20.828,56.261 23.241,58.674 35.052,58.674 35.306,58.42 35.306,56.642 36.83,55.118 36.83,51.435 36.195,50.8 v1(35.433,50.8)
USART2_TX: J3.6 U1.12 | length 66.4
  Top Layer w0.152: v1@9.144,44.069 v1(9.144,43.942) 6.731,46.355 6.731,53.34 8.128,54.737 8.128,58.674 8.509,59.055 14.224,59.055 16.383,56.896 20.955,56.896 22.86,58.801 37.592,58.801 v1(37.719,58.674) ; v1(35.687,49.784) 35.687,50.038 36.659,51.01 U1.12
  Bottom Layer w0.152: v1(9.144,43.942) 11.557,41.529 J3.6 ; v1(35.687,49.784) 36.83,49.784 37.846,50.8 37.846,52.546 38.227,52.927 38.227,55.658 37.846,56.039 37.846,57.785 37.719,57.912 v1(37.719,58.674)
UTX: J3.3 U3.2 | length 22.4
  Top Layer w0.152: v1(20.066,20.574) 20.193,20.447 U3.2
  Bottom Layer w0.152: J3.3 16.891,37.973 16.891,26.035 18.415,24.511 18.415,21.59 19.431,20.574 v1(20.066,20.574)
VBUS: POW-SW1.1 U2.1 | length 26
  Top Layer w0.254: v1(12.222,3.048) U2.1
  Top Layer w0.508: v1(1.143,6.35) 0.762,5.969 0.762,1.905 1.905,0.762 11.176,0.762 11.557,1.143 11.557,2.383 v1(12.222,3.048)
  Bottom Layer w0.508: v1(1.143,6.35) 1.143,9.779 v1(2.413,11.049)
  other v1: 12.954,5.588 13.843,5.715 13.335,6.096 13.843,6.731 6.477,10.795 6.604,12.827 2.413,13.081
VCC3V3: C2.1 C3.1 C11.1 C15.1 D3.1 D5.1 J1.1 J5.1 J7.1 J9.8 J10.4 P1.1 P1.2 R3.2 R8.2 R9.2 R10.2 R11.2 R13.2 R16.2 U1.9 U1.24 U1.36 U1.48 U3.4 U3.16 U4.2 | length 342.9
  Top Layer w0.254: v1(8.636,32.258) 9.271,32.893 v1(29.464,32.893) ; P1.2 12.954,54.356 26.289,54.356 v1(26.924,53.721) ; v1(28.169,44.831) 28.169,45.212 28.156,45.225 28.441,45.51 U1.36 ; v1(29.718,52.705) 30.256,52.705 U1.24 U1.24@30.651,51.518 ; v1@32.956,49.721 34.163,48.514 34.925,48.514 35.433,48.006 35.433,45.847 36.151,45.129 U1.48 ; v1(33.02,49.784) 33.655,49.149 36.068,49.149 36.429,49.51 U1.9
  Top Layer w0.508: v1(1.397,47.625) 1.397,34.671 2.286,33.782 v1(2.286,32.131) ; v1@2.286,27.305 1.143,26.162 1.143,8.382 3.048,6.477 6.985,6.477 10.668,10.16 15.748,10.16 v1(18.161,7.747) ; C2.1 3.175,34.036 5.588,36.449 D3.1 ; P1.2 P1.1 ; v1(15.748,59.436) 16.129,59.817 44.45,59.817 J1.1 58.801,57.531 63.881,52.451 63.881,48.895 62.484,47.498 56.642,47.498 ; R3.2 18.193,7.715 v1(18.161,7.747) ; U3.4 v1(19.939,17.907) 18.796,16.764 18.796,16.002 18.161,15.367 18.161,9.271 ; U3.16 v1(29.337,21.717) 30.48,20.574 30.48,13.843 31.75,12.573 ; D5.1 43.434,33.909 v1(43.815,33.528) 46.482,33.528 48.641,35.687 48.641,42.037 54.102,47.498 56.642,47.498 ; J5.1@57.912,12.827 57.785,12.7 J7.1 R13.2 39.939,12.7 R8.2 R9.2 R10.2 R11.2 31.816,12.639 31.75,12.573 ; J5.1@58.039,12.827 R16.2 ; J10.4 56.642,47.53 56.642,47.498 ; v1(18.161,7.747) 18.161,9.271 ; 18.161,9.271 20.066,11.176 29.337,11.176 30.734,12.573 31.75,12.573
  Bottom Layer w0.254: v1(26.924,53.721) 28.194,53.721 29.21,52.705 v1(29.718,52.705) 32.639,49.784 v1(33.02,49.784) ; v1(28.169,44.831) 26.924,43.586 26.924,35.306 29.337,32.893 v1(29.464,32.893)
  Bottom Layer w0.508: v1(1.397,47.625) 1.905,48.133 13.081,48.133 14.351,49.403 14.351,52.959 P1.2 ; P1.1@12.192,57.785 12.192,58.928 12.7,59.436 v1(15.748,59.436) ; C15.1 28.829,21.209 v1(29.337,21.717) ; J7.1 49.403,16.891 J9.8 J9.8@49.403,24.384
  other v1: 2.383,27.254 9.017,28.067 7.747,28.194 2.159,29.845 3.683,29.972 2.159,30.861 7.747,30.988 8.763,30.988 7.747,32.258
VCC5V: C9.1 C10.2 D1.2 D2.2 J9.9 R4.1 U4.3 | length 80.8
  Top Layer w0.508: v1(26.035,9.779) v1(45.847,9.779)
  Bottom Layer w0.508: v1(13.335,15.113) 13.335,13.589 6.731,6.985 6.731,2.413 8.128,1.016 13.208,1.016 16.51,4.318 24.003,4.318 24.892,5.207 24.892,8.89 v1@25.781,9.779 ; v1(45.847,9.779) 50.292,9.779 52.578,12.065 52.578,20.193 51.943,20.828 J9.9
  other v1: 12.192,17.78 11.811,19.05 13.081,19.05 15.24,19.05 16.51,19.05 9.652,20.32 7.112,20.828 7.112,22.098 6.985,23.241 5.461,23.368 5.461,24.638
pads on no net: J1.8 J5.3 J10.2 J10.3 J11.1 J11.2 J11.3 J11.4 J11.6 KEY1.2 KEY1.4 KEY2.2 KEY2.4 KEY3.2 KEY3.4 KEY4.2 KEY4.4 KEY_RST.2 KEY_RST.4 POW-SW1.4 POW-SW1.5 U2. U2.MH1 U2.MH2 U3.9 U3.10 U3.11 U3.12 U3.13 U3.14 U3.15

## Polygon pours and split planes (outlines as drawn)
GND on Top Layer "GND_L01_P048" (solid, remove dead copper, pour order 48): 0.889,60.198 65.913,60.198 66.548,59.563 66.548,0.889 66.548,0.635 66.04,0.127 0.889,0.127 0.889,0.254 0.127,1.016 0.127,59.563 0.254,59.563 0.889,60.198
VCC3V3 on Top Layer "VCC3V3_L01_P026" (solid, remove dead copper, pour order 26): 7.112,32.766 8.89,32.766 8.89,31.496 9.144,31.242 9.525,30.861 9.525,29.337 9.525,27.432 7.112,27.432 7.112,32.766
GND on Top Layer "GND_L01_P004" (solid, remove dead copper, pour order 4): 9.398,7.239 10.541,7.239 10.541,1.778 9.398,1.778
VBUS on Top Layer "VBUS_L01_P006" (solid, remove dead copper, pour order 6): 11.938,7.112 14.224,7.112 14.224,5.08 14.097,4.953 13.335,4.953 12.446,4.953 12.446,4.318 12.446,3.683 11.938,3.683
VBUS on Top Layer "VBUS_L01_P008" (solid, remove dead copper, pour order 8): 1.778,13.716 7.366,13.716 7.366,10.287 7.239,10.16 1.778,10.16 1.778,13.716
NetD1_1 on Top Layer "NETD1_1_L01_P010" (solid, remove dead copper, pour order 10): 1.905,19.05 6.985,19.05 6.985,16.51 12.065,16.51 12.065,13.462 11.938,13.335 8.128,13.335 8.001,13.335 7.112,14.224 6.985,14.351 1.905,14.351 1.905,19.05
VCC5V on Top Layer "VCC5V_L01_P012" (solid, remove dead copper, pour order 12): 8.001,23.114 10.795,23.114 11.049,22.86 11.049,20.193 13.97,20.193 14.097,20.32 14.097,21.59 17.145,21.59 17.145,18.415 15.875,18.415 15.24,17.78 15.24,14.605 12.7,14.605 12.7,17.145 8.128,17.145 8.001,17.272 8.001,23.114
GND on Top Layer "GND_L01_P014" (solid, remove dead copper, pour order 14): 11.303,23.241 11.303,20.447 13.589,20.447 13.716,20.574 13.716,22.098 16.891,22.098 17.018,22.225 17.018,24.638 11.557,24.638 11.557,23.622 11.303,23.368 11.303,22.352
VCC5V on Top Layer "VCC5V_L01_P016" (solid, remove dead copper, pour order 16): 3.175,25.019 5.588,25.019 5.588,25.4 6.096,25.908 7.747,25.908 7.747,23.241 7.874,23.114 8.128,22.86 10.877,22.86 10.877,20.365 11.049,20.193 6.35,20.193 6.35,22.479 5.969,22.86 3.175,22.86 3.175,25.019
VCC3V3 on Top Layer "VCC3V3_L01_P018" (solid, remove dead copper, pour order 18): 1.905,32.766 4.064,32.766 4.064,25.273 1.905,25.273 1.905,32.766
GND on Top Layer "GND_L01_P020" (solid, remove dead copper, pour order 20): 4.445,32.766 6.731,32.766 6.731,26.035 6.604,25.908 4.318,25.908 4.318,32.639 4.445,32.766
GND on Top Layer "GND_L01_P024" (solid, remove dead copper, pour order 24): 9.906,31.75 9.906,26.67 10.033,26.543 10.795,25.781 11.557,25.781 11.557,23.896 11.642,23.811 13.25,23.811 13.25,31.2 12.7,31.75 9.906,31.75
GND on Bottom Layer "GND_L02_P052" (solid, remove dead copper, pour order 52): 1.016,60.071 65.913,60.071 66.167,60.071 66.548,59.69 66.548,0.762 66.548,0.635 65.913,0 65.659,0.254 0.889,0.254 0.889,0.381 0.127,1.143 0.127,59.563 0.254,59.563 0.762,60.071
NetD1_1 on Bottom Layer "NETD1_1_L02_P036" (solid, remove dead copper, pour order 36): 1.905,18.923 6.858,18.923 6.858,16.637 6.985,16.51 11.938,16.51 11.938,13.335 8.001,13.335 7.747,13.335 6.731,14.351 4.064,14.351 1.905,14.351 1.905,18.923
GND on Bottom Layer "GND_L02_P034" (solid, remove dead copper, pour order 34): 10.541,1.778 10.541,7.112 9.398,7.112 9.398,3.556 8.128,3.556 8.128,1.778 10.541,1.778
VBUS on Bottom Layer "VBUS_L02_P032" (solid, remove dead copper, pour order 32): 12.065,7.112 14.224,7.112 14.224,5.08 11.938,5.08 11.938,7.112 12.065,7.112
VBUS on Bottom Layer "VBUS_L02_P030" (solid, remove dead copper, pour order 30): 1.778,13.716 7.493,13.716 7.493,10.16 1.778,10.16 1.778,13.716
VCC5V on Bottom Layer "VCC5V_L02_P028" (solid, remove dead copper, pour order 28): 3.302,25.019 7.112,25.019 7.366,24.765 8.382,23.749 8.382,22.733 10.414,22.733 12.573,20.574 12.954,20.193 17.018,20.193 17.018,17.907 16.891,17.78 16.764,17.653 15.367,17.653 15.367,15.621 13.97,14.224 12.7,14.224 12.573,14.351 12.319,14.605 12.319,16.383 12.192,16.383 11.557,17.018 8.89,19.685 6.223,19.685 6.223,22.225 5.969,22.479 5.588,22.86 4.445,22.86 3.302,24.003 3.302,25.019
VCC3V3 on Bottom Layer "VCC3V3_L02_P022" (solid, remove dead copper, pour order 22): 7.239,30.48 9.525,30.48 9.525,27.432 7.62,27.432 5.588,25.4 5.461,25.273 1.778,25.273 1.778,32.766 7.239,32.766 7.239,30.48

## Keep-outs
Keep-Out Layer:
  lines w0.2: 0,59.309 0,1.016 ; 0,59.325 cw(c1,59.325) 1.016,60.325 65.659,60.325 ; 1.016,0 65.659,0 ccw(c65.675,1) 66.675,1 ; 65.675,60.325 cw(c65.675,59.325) 66.675,59.309 66.675,1.016 ; 0,1.016 ccw(c1,1) 1,0 cw(c1,1) 0,1.016

## Other copper
Top Layer:
  rectangle net GND: 12.319,22.352 16.002,24.511
  rectangle net GND: 10.287,26.416 12.954,28.956
  rectangle net VCC5V: 4.445,22.86 7.239,25.019
  rectangle net VCC5V: 14.351,18.415 16.383,20.447
  rectangle net VCC5V: 10.795,17.272 15.24,19.812
  rectangle net VCC5V: 8.128,19.939 10.922,21.717
  rectangle net VCC3V3: 7.112,27.432 9.525,32.766
  rectangle net VBUS: 12.573,5.08 14.224,7.112
  rectangle net GND: 9.525,1.778 10.541,4.572
  rectangle net GND: 9.398,3.862 10.043,5.616
  rectangle net GND: 9.779,5.616 10.043,7.112
  rectangle net GND: 8.128,1.778 10.16,3.556
  rectangle net VBUS: 11.938,5.137 12.676,7.112
  rectangle net NetD1_1: 2.159,16.383 6.35,19.05
  rectangle net NetD1_1: 2.159,14.351 6.985,16.383
  rectangle net NetD1_1: 8.382,13.716 10.795,16.51
  rectangle net VCC5V: 13.081,15.24 14.859,18.034
  rectangle net VCC5V: 8.001,17.145 10.922,20.074
  rectangle net VCC5V: 8.001,20.815 10.877,22.86
  rectangle net VCC5V: 14.351,20.074 16.523,21.336
  rectangle net GND: 11.303,21.463 13.462,23.368
  rectangle net GND: 14.465,22.098 16.891,23.582
  rectangle net VCC5V: 6.731,20.32 8.763,23.495
  rectangle net VCC5V: 3.175,22.893 4.826,24.765
  rectangle net VCC3V3: 2.286,25.496 3.591,32.512
  rectangle net GND: 9.906,28.575 12.065,31.496
Bottom Layer:
  rectangle net GND: 12.446,22.86 15.367,25.273
  rectangle net GND: 10.033,25.654 13.081,26.67
  rectangle net GND: 12.954,22.352 16.637,24.638
  rectangle net GND: 9.906,26.416 12.7,30.734
  rectangle net GND: 8.128,1.778 10.414,3.556
  rectangle net VBUS: 12.827,5.207 14.224,7.112
  rectangle net VCC3V3: 7.239,28.797 9.041,32.766
  rectangle net VCC3V3: 6.477,27.686 9.017,31.623

## Silkscreen, mask and mechanical layers (free items; w line width, h text height)
Top Overlay:
  lines w0.2: 24.003,59.924 24.003,26.924 51.003,26.924 51.003,59.924 ; 58.293,37.973 58.293,48.482 ; 66.421,32.766 55.499,32.766 55.499,53.783 66.359,53.783 66.421,53.721
  text "毕设2021" at 56.388,26.289 h1.52
Mechanical 13:
  lines w0.2: 0,1 0,59.325 ; 0,1.016 ccw(c1.016,1.016) 1.016,0 ; 0,59.309 cw(c1.016,59.309) 1.016,60.325 ; 1,0 65.675,0 ; 1,60.325 65.675,60.325 ; 65.659,0 ccw(c65.659,1.016) 66.675,1.016 ; 65.659,60.325 cw(c65.659,59.309) 66.675,59.309 ; 66.675,1 66.675,59.325